# Altium PCB Chopper PMDC.PcbDoc (part 2 of 2)
Units mm, origin at the board's own origin, x right, y up, seen from the top; angles counter-clockwise.
Board outline 47.75 x 46.74 mm, 2 copper layers (Top Layer, Bottom Layer); 58 components, 29 nets, 163 pads, 6 vias.
Unrouted connection lines stored in the file: 2.
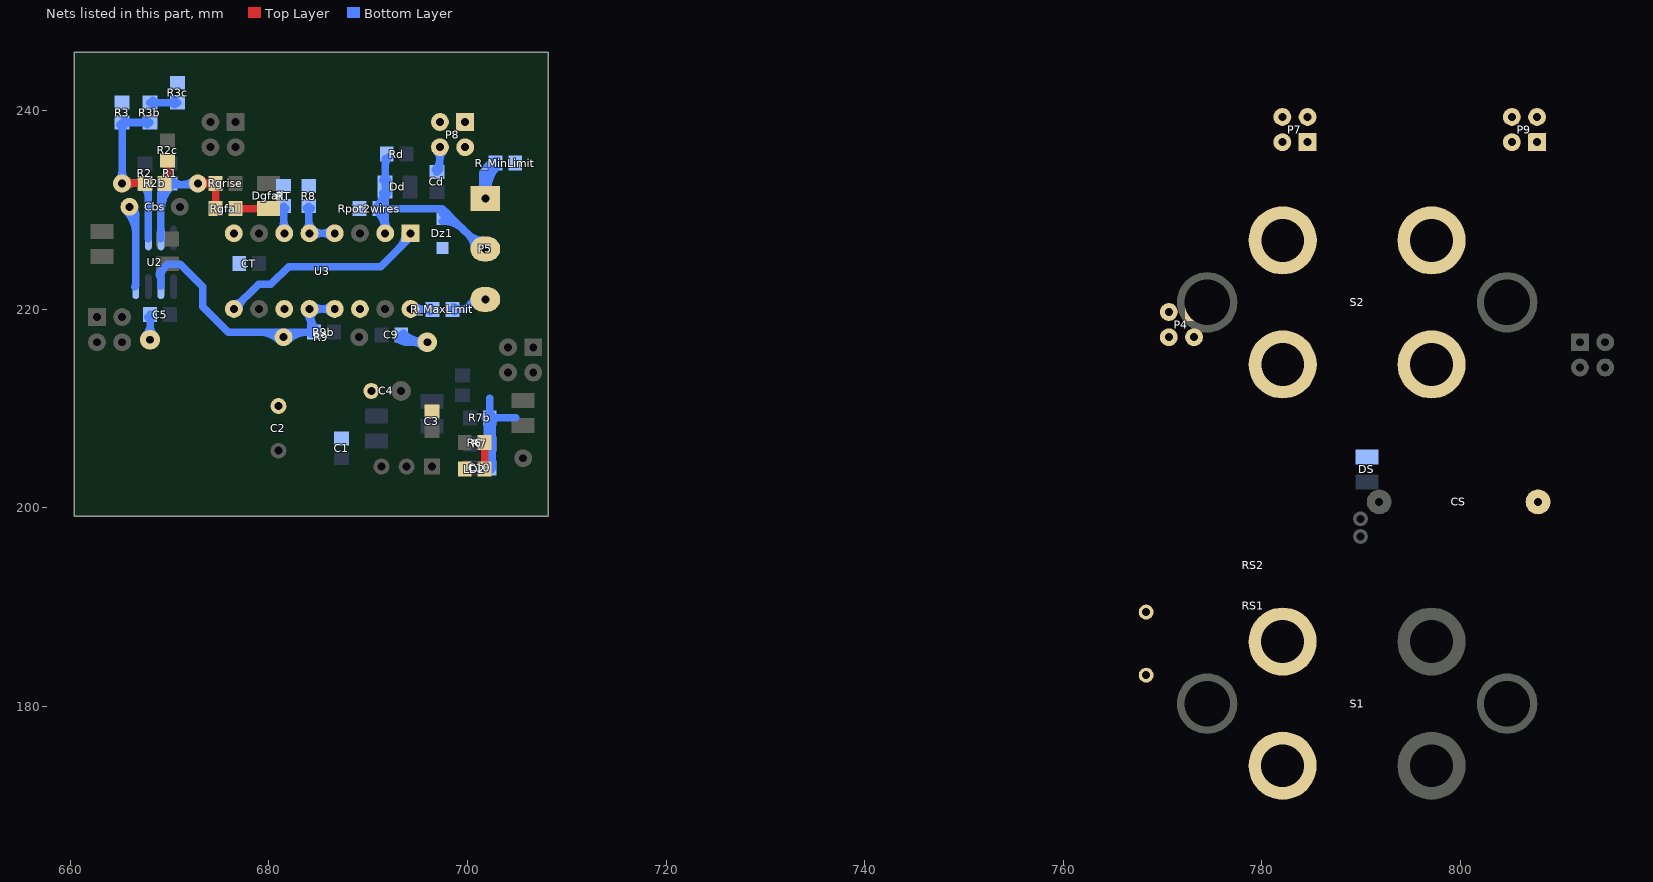
[diagram p2: the nets of this part, all layers, seen from the top]

## Via types
v1: diameter 1.8, hole 0.8, Top Layer to Bottom Layer, 3 vias
v2: diameter 2, hole 0.8, Top Layer to Bottom Layer, 2 vias
v3: diameter 3, hole 0.8, Top Layer to Bottom Layer, 1 vias

## Nets (pads, with @x,y where several pads share a name; then routed paths per layer and width w, separated by ;. In a path a pad name is that pad's centre, name@x,y a point inside that pad or via, vN(x,y) a via of type N, cw(c..) or ccw(c..) an arc to the next point about the centre after c; other vN are vias at no path point) (continued)
NetDgfall_2: Dgfall.K Rgfall.1 | length 13.2
  Top Layer w0.762: Rgfall.1@676.64,230.124 Dgfall.K@679.45,230.124 ; Rgfall.1@676.866,229.898 cw(c677.41,229.354) 677.41,230.124 ; Rgfall.1@676.866,229.898 cw(c677.41,229.354) 677.41,230.124 ; Rgfall.1@676.866,229.898 cw(c677.41,229.354) 677.41,230.124 ; Rgfall.1@676.866,229.898 cw(c677.41,229.354) 677.41,230.124 ; Rgfall.1@676.866,230.35 ccw(c677.41,230.894) 677.41,230.124 ; Rgfall.1@676.866,230.35 ccw(c677.41,230.894) 677.41,230.124 ; Rgfall.1@676.866,230.35 ccw(c677.41,230.894) 677.41,230.124 ; Rgfall.1@676.866,230.35 ccw(c677.41,230.894) 677.41,230.124 ; 678.627,230.124 ccw(c678.627,231.072) Dgfall.K@679.297,230.402 ; 678.627,230.124 ccw(c678.627,231.072) Dgfall.K@679.297,230.402 ; 678.627,230.124 ccw(c678.627,231.072) Dgfall.K@679.297,230.402 ; 678.627,230.124 ccw(c678.627,231.072) Dgfall.K@679.297,230.402 ; 678.708,230.124 cw(c678.708,229.291) Dgfall.K@679.297,229.88 ; 678.708,230.124 cw(c678.708,229.291) Dgfall.K@679.297,229.88 ; 678.708,230.124 cw(c678.708,229.291) Dgfall.K@679.297,229.88 ; 678.708,230.124 cw(c678.708,229.291) Dgfall.K@679.297,229.88
NetDS_1: DS.A P4.1 P4.2 P4.3 P4.4 RS1.2 RS2.2 S1.1 S2.3
NetLD2_1: LD2.1 R6.1 | length 12.2
  Top Layer w0.762: LD2.1@701.735,204.14 R6.1@701.735,206.553 R6.1@701.735,206.664 ; LD2.1@701.51,204.161 ccw(c700.965,204.706) 701.735,204.706 ; LD2.1@701.51,204.161 ccw(c700.965,204.706) 701.735,204.706 ; LD2.1@701.51,204.161 ccw(c700.965,204.706) 701.735,204.706 ; LD2.1@701.51,204.161 ccw(c700.965,204.706) 701.735,204.706 ; R6.1@701.51,206.277 cw(c700.965,205.733) 701.735,205.733 ; R6.1@701.51,206.277 cw(c700.965,205.733) 701.735,205.733 ; R6.1@701.51,206.277 cw(c700.965,205.733) 701.735,205.733 ; R6.1@701.51,206.277 cw(c700.965,205.733) 701.735,205.733 ; 701.735,204.706 ccw(c702.505,204.706) LD2.1@701.961,204.161 ; 701.735,204.706 ccw(c702.505,204.706) LD2.1@701.961,204.161 ; 701.735,204.706 ccw(c702.505,204.706) LD2.1@701.961,204.161 ; 701.735,204.706 ccw(c702.505,204.706) LD2.1@701.961,204.161 ; 701.735,205.733 cw(c702.505,205.733) R6.1@701.961,206.277 ; 701.735,205.733 cw(c702.505,205.733) R6.1@701.961,206.277 ; 701.735,205.733 cw(c702.505,205.733) R6.1@701.961,206.277 ; 701.735,205.733 cw(c702.505,205.733) R6.1@701.961,206.277
NetP5_1: P5.1 R_MinLimit.1 | length 32
  Bottom Layer w1.27: P5.1@701.802,231.14 701.802,233.68 R_MinLimit.1@702.818,234.696 ; P5.1@701.367,231.575 ccw(c700.317,232.625) 701.802,232.625 ; P5.1@701.367,231.575 ccw(c700.317,232.625) 701.802,232.625 ; P5.1@701.367,231.575 ccw(c700.317,232.625) 701.802,232.625 ; P5.1@701.367,231.575 ccw(c700.317,232.625) 701.802,232.625 ; P5.1@701.802,232.036 cw(c705.428,232.036) R_MinLimit.1@702.864,234.6 ; P5.1@701.802,232.036 cw(c705.428,232.036) R_MinLimit.1@702.864,234.6 ; P5.1@701.802,232.036 cw(c705.428,232.036) R_MinLimit.1@702.864,234.6 ; P5.1@701.802,232.036 cw(c705.428,232.036) R_MinLimit.1@702.864,234.6 ; 701.802,232.625 ccw(c703.287,232.625) P5.1@702.237,231.575 ; 701.802,232.625 ccw(c703.287,232.625) P5.1@702.237,231.575 ; 701.802,232.625 ccw(c703.287,232.625) P5.1@702.237,231.575 ; 701.802,232.625 ccw(c703.287,232.625) P5.1@702.237,231.575 ; 701.802,233.244 cw(c703.187,233.244) R_MinLimit.1@702.835,234.583 ; 701.802,233.244 cw(c703.187,233.244) R_MinLimit.1@702.835,234.583 ; 701.802,233.244 cw(c703.187,233.244) R_MinLimit.1@702.835,234.583 ; 701.802,233.244 cw(c703.187,233.244) R_MinLimit.1@702.835,234.583
NetP5_3: P5.3 R_MaxLimit.2 | length 13.7
  Bottom Layer w0.762: R_MaxLimit.2@698.484,219.964 699.77,219.964 700.786,220.98 P5.3@701.802,220.98 ; R_MaxLimit.2@698.71,219.738 cw(c699.254,219.194) 699.254,219.964 ; R_MaxLimit.2@698.71,219.738 cw(c699.254,219.194) 699.254,219.964 ; R_MaxLimit.2@698.71,219.738 cw(c699.254,219.194) 699.254,219.964 ; R_MaxLimit.2@698.71,219.738 cw(c699.254,219.194) 699.254,219.964 ; R_MaxLimit.2@698.71,220.19 ccw(c699.254,220.734) 699.254,219.964 ; R_MaxLimit.2@698.71,220.19 ccw(c699.254,220.734) 699.254,219.964 ; R_MaxLimit.2@698.71,220.19 ccw(c699.254,220.734) 699.254,219.964 ; R_MaxLimit.2@698.71,220.19 ccw(c699.254,220.734) 699.254,219.964 ; 700.35,220.544 cw(c701.235,219.658) P5.3@701.527,220.876 ; 700.35,220.544 cw(c701.235,219.658) P5.3@701.527,220.876 ; 700.35,220.544 cw(c701.235,219.658) P5.3@701.527,220.876 ; 700.35,220.544 cw(c701.235,219.658) P5.3@701.527,220.876
NetP7_1: P7.1 P7.2 P7.3 P7.4 S2.2
NetR1_2: R1.2 Rgfall.2 Rgrise.2 U2.7 | length 73.9
  Top Layer w0.762: v1(672.846,232.664) Rgrise.2@674.624,232.664 ; Rgfall.2@674.64,230.394 Rgrise.2@674.64,232.664 ; v1@673.213,232.297 cw(c674.099,231.411) Rgrise.2@674.099,232.664 ; v1@673.213,232.297 cw(c674.099,231.411) Rgrise.2@674.099,232.664 ; v1@673.213,232.297 cw(c674.099,231.411) Rgrise.2@674.099,232.664 ; v1@673.213,232.297 cw(c674.099,231.411) Rgrise.2@674.099,232.664 ; v1@673.213,233.031 ccw(c674.099,233.917) Rgrise.2@674.099,232.664 ; v1@673.213,233.031 ccw(c674.099,233.917) Rgrise.2@674.099,232.664 ; v1@673.213,233.031 ccw(c674.099,233.917) Rgrise.2@674.099,232.664 ; v1@673.213,233.031 ccw(c674.099,233.917) Rgrise.2@674.099,232.664 ; 673.87,232.664 cw(c673.87,231.894) Rgrise.2@674.414,232.438 ; 673.87,232.664 ccw(c673.87,233.434) Rgrise.2@674.414,232.89 ; 673.87,232.664 ccw(c673.87,233.434) Rgrise.2@674.414,232.89 ; 673.87,232.664 cw(c673.87,231.894) Rgrise.2@674.414,232.438 ; 673.87,232.664 ccw(c673.87,233.434) Rgrise.2@674.414,232.89 ; 673.87,232.664 cw(c673.87,231.894) Rgrise.2@674.414,232.438 ; 673.87,232.664 ccw(c673.87,233.434) Rgrise.2@674.414,232.89 ; 673.87,232.664 cw(c673.87,231.894) Rgrise.2@674.414,232.438 ; Rgfall.2@674.414,230.4 ccw(c673.87,230.944) 674.64,230.944 ; Rgfall.2@674.414,230.4 ccw(c673.87,230.944) 674.64,230.944 ; Rgfall.2@674.414,230.4 ccw(c673.87,230.944) 674.64,230.944 ; Rgfall.2@674.414,230.4 ccw(c673.87,230.944) 674.64,230.944 ; Rgrise.2@674.414,232.388 cw(c673.87,231.844) 674.64,231.844 ; Rgrise.2@674.414,232.388 cw(c673.87,231.844) 674.64,231.844 ; Rgrise.2@674.414,232.388 cw(c673.87,231.844) 674.64,231.844 ; Rgrise.2@674.414,232.388 cw(c673.87,231.844) 674.64,231.844 ; 674.64,230.944 ccw(c675.41,230.944) Rgfall.2@674.866,230.4 ; 674.64,230.944 ccw(c675.41,230.944) Rgfall.2@674.866,230.4 ; 674.64,230.944 ccw(c675.41,230.944) Rgfall.2@674.866,230.4 ; 674.64,230.944 ccw(c675.41,230.944) Rgfall.2@674.866,230.4 ; 674.64,231.844 cw(c675.41,231.844) Rgrise.2@674.866,232.388 ; 674.64,231.844 cw(c675.41,231.844) Rgrise.2@674.866,232.388 ; 674.64,231.844 cw(c675.41,231.844) Rgrise.2@674.866,232.388 ; 674.64,231.844 cw(c675.41,231.844) Rgrise.2@674.866,232.388
  Bottom Layer w0.762: U2.7@669.138,227.114 U2.7@669.138,227.164 669.138,231.623 670.052,232.537 v1@672.719,232.537 ; 669.138,229.807 cw(c672.859,229.807) R1.2@670.228,232.438 ; 669.138,229.807 cw(c672.859,229.807) R1.2@670.228,232.438 ; 669.138,229.807 cw(c672.859,229.807) R1.2@670.228,232.438 ; 669.138,229.807 cw(c672.859,229.807) R1.2@670.228,232.438 ; 669.138,231.311 cw(c670.184,231.311) R1.2@670.045,232.348 ; 669.138,231.311 cw(c670.184,231.311) R1.2@670.045,232.348 ; 669.138,231.311 cw(c670.184,231.311) R1.2@670.045,232.348 ; 669.138,231.311 cw(c670.184,231.311) R1.2@670.045,232.348 ; 669.138,231.647 cw(c671.019,231.647) R1.2@669.689,232.977 ; 669.138,231.647 cw(c671.019,231.647) R1.2@669.689,232.977 ; 669.138,231.647 cw(c671.019,231.647) R1.2@669.689,232.977 ; 669.138,231.647 cw(c671.019,231.647) R1.2@669.689,232.977 ; 669.332,231.817 ccw(c668.486,232.664) R1.2@669.683,232.664 ; 669.332,231.817 ccw(c668.486,232.664) R1.2@669.683,232.664 ; 669.332,231.817 ccw(c668.486,232.664) R1.2@669.683,232.664 ; 669.332,231.817 ccw(c668.486,232.664) R1.2@669.683,232.664 ; R1.2@670.328,232.89 ccw(c671.179,233.741) 671.179,232.537 ; R1.2@670.328,232.89 ccw(c671.179,233.741) 671.179,232.537 ; R1.2@670.328,232.89 ccw(c671.179,233.741) 671.179,232.537 ; R1.2@670.328,232.89 ccw(c671.179,233.741) 671.179,232.537 ; 671.286,232.537 ccw(c671.286,234.224) v1@672.479,233.031 ; 671.286,232.537 ccw(c671.286,234.224) v1@672.479,233.031 ; 671.286,232.537 ccw(c671.286,234.224) v1@672.479,233.031 ; 671.286,232.537 ccw(c671.286,234.224) v1@672.479,233.031 ; 671.9,232.537 cw(c671.9,231.718) v1@672.479,232.297 ; 671.9,232.537 cw(c671.9,231.718) v1@672.479,232.297 ; 671.9,232.537 cw(c671.9,231.718) v1@672.479,232.297 ; 671.9,232.537 cw(c671.9,231.718) v1@672.479,232.297
NetR2_2: R2.2 R2b.2 R3.1 R3b.1 U2.6 | length 72.8
  Top Layer w0.762: v1(665.226,232.664) R2b.2@667.512,232.664 ; v1@665.593,232.297 cw(c666.479,231.411) 666.479,232.664 ; v1@665.593,232.297 cw(c666.479,231.411) 666.479,232.664 ; v1@665.593,232.297 cw(c666.479,231.411) 666.479,232.664 ; v1@665.593,232.297 cw(c666.479,231.411) 666.479,232.664 ; v1@665.593,233.031 ccw(c666.479,233.917) 666.479,232.664 ; v1@665.593,233.031 ccw(c666.479,233.917) 666.479,232.664 ; v1@665.593,233.031 ccw(c666.479,233.917) 666.479,232.664 ; v1@665.593,233.031 ccw(c666.479,233.917) 666.479,232.664 ; 666.742,232.664 cw(c666.742,231.894) R2b.2@667.286,232.438 ; 666.742,232.664 ccw(c666.742,233.434) R2b.2@667.286,232.89 ; 666.742,232.664 ccw(c666.742,233.434) R2b.2@667.286,232.89 ; 666.742,232.664 cw(c666.742,231.894) R2b.2@667.286,232.438 ; 666.742,232.664 ccw(c666.742,233.434) R2b.2@667.286,232.89 ; 666.742,232.664 cw(c666.742,231.894) R2b.2@667.286,232.438 ; 666.742,232.664 ccw(c666.742,233.434) R2b.2@667.286,232.89 ; 666.742,232.664 cw(c666.742,231.894) R2b.2@667.286,232.438
  Bottom Layer w0.762: R2.2@667.512,232.664 R2.2@667.258,232.664 ; U2.6@667.868,227.114 U2.6@667.868,227.164 667.868,232.054 667.385,232.537 R2.2@667.258,232.664 ; R3b.1@668.02,238.792 R3.1@665.226,238.792 v1(665.226,232.664) R2.2@667.258,232.664 ; v1@664.859,233.031 ccw(c663.973,233.917) 665.226,233.917 ; v1@664.859,233.031 ccw(c663.973,233.917) 665.226,233.917 ; v1@664.859,233.031 ccw(c663.973,233.917) 665.226,233.917 ; v1@664.859,233.031 ccw(c663.973,233.917) 665.226,233.917 ; R3.1@665,238.566 cw(c664.456,238.022) 665.226,238.022 ; R3.1@665,238.566 cw(c664.456,238.022) 665.226,238.022 ; R3.1@665,238.566 cw(c664.456,238.022) 665.226,238.022 ; R3.1@665,238.566 cw(c664.456,238.022) 665.226,238.022 ; 665.226,233.917 ccw(c666.479,233.917) v1@665.593,233.031 ; 665.226,233.917 ccw(c666.479,233.917) v1@665.593,233.031 ; 665.226,233.917 ccw(c666.479,233.917) v1@665.593,233.031 ; 665.226,233.917 ccw(c666.479,233.917) v1@665.593,233.031 ; 665.226,238.022 cw(c665.996,238.022) R3.1@665.452,238.566 ; 665.226,238.022 cw(c665.996,238.022) R3.1@665.452,238.566 ; 665.226,238.022 cw(c665.996,238.022) R3.1@665.452,238.566 ; 665.226,238.022 cw(c665.996,238.022) R3.1@665.452,238.566 ; R3.1@665.502,238.566 cw(c666.046,238.022) 666.046,238.792 ; R3.1@665.502,238.566 cw(c666.046,238.022) 666.046,238.792 ; R3.1@665.502,238.566 cw(c666.046,238.022) 666.046,238.792 ; R3.1@665.502,238.566 cw(c666.046,238.022) 666.046,238.792 ; R3.1@665.502,239.018 ccw(c666.046,239.562) 666.046,238.792 ; R3.1@665.502,239.018 ccw(c666.046,239.562) 666.046,238.792 ; R3.1@665.502,239.018 ccw(c666.046,239.562) 666.046,238.792 ; R3.1@665.502,239.018 ccw(c666.046,239.562) 666.046,238.792 ; v1@665.593,232.297 cw(c666.479,231.411) 666.479,232.664 ; v1@665.593,232.297 cw(c666.479,231.411) 666.479,232.664 ; v1@665.593,232.297 cw(c666.479,231.411) 666.479,232.664 ; v1@665.593,232.297 cw(c666.479,231.411) 666.479,232.664 ; v1@665.593,233.031 ccw(c666.479,233.917) 666.479,232.664 ; v1@665.593,233.031 ccw(c666.479,233.917) 666.479,232.664 ; v1@665.593,233.031 ccw(c666.479,233.917) 666.479,232.664 ; v1@665.593,233.031 ccw(c666.479,233.917) 666.479,232.664 ; 666.692,232.664 cw(c666.692,231.894) R2.2@667.236,232.438 ; 666.692,232.664 ccw(c666.692,233.434) R2.2@667.236,232.89 ; 666.692,232.664 ccw(c666.692,233.434) R2.2@667.236,232.89 ; 666.692,232.664 cw(c666.692,231.894) R2.2@667.236,232.438 ; 666.692,232.664 ccw(c666.692,233.434) R2.2@667.236,232.89 ; 666.692,232.664 cw(c666.692,231.894) R2.2@667.236,232.438 ; 666.692,232.664 ccw(c666.692,233.434) R2.2@667.236,232.89 ; 666.692,232.664 cw(c666.692,231.894) R2.2@667.236,232.438 ; 667.2,238.792 cw(c667.2,238.022) R3b.1@667.744,238.566 ; 667.2,238.792 ccw(c667.2,239.562) R3b.1@667.744,239.018 ; 667.2,238.792 ccw(c667.2,239.562) R3b.1@667.744,239.018 ; 667.2,238.792 cw(c667.2,238.022) R3b.1@667.744,238.566 ; 667.2,238.792 ccw(c667.2,239.562) R3b.1@667.744,239.018 ; 667.2,238.792 cw(c667.2,238.022) R3b.1@667.744,238.566 ; 667.2,238.792 ccw(c667.2,239.562) R3b.1@667.744,239.018 ; 667.2,238.792 cw(c667.2,238.022) R3b.1@667.744,238.566 ; R2.2@667.336,232.438 cw(c666.054,231.156) 667.868,231.156 ; R2.2@667.336,232.438 cw(c666.054,231.156) 667.868,231.156 ; R2.2@667.336,232.438 cw(c666.054,231.156) 667.868,231.156 ; R2.2@667.336,232.438 cw(c666.054,231.156) 667.868,231.156
NetR2b_1: R2b.1 R2c.2 | length 12.7
  Top Layer w0.762: R2b.1@669.512,232.664 669.798,232.95 R2c.2@669.798,234.95 ; R2b.1@669.286,232.94 ccw(c668.051,234.175) 669.798,234.175 ; R2b.1@669.286,232.94 ccw(c668.051,234.175) 669.798,234.175 ; R2b.1@669.286,232.94 ccw(c668.051,234.175) 669.798,234.175 ; R2b.1@669.286,232.94 ccw(c668.051,234.175) 669.798,234.175 ; R2c.2@669.572,234.756 cw(c669.028,234.212) 669.798,234.212 ; R2c.2@669.572,234.756 cw(c669.028,234.212) 669.798,234.212 ; R2c.2@669.572,234.756 cw(c669.028,234.212) 669.798,234.212 ; R2c.2@669.572,234.756 cw(c669.028,234.212) 669.798,234.212 ; 669.798,234.212 cw(c670.568,234.212) R2c.2@670.024,234.756 ; 669.798,234.212 cw(c670.568,234.212) R2c.2@670.024,234.756 ; 669.798,234.212 cw(c670.568,234.212) R2c.2@670.024,234.756 ; 669.798,234.212 cw(c670.568,234.212) R2c.2@670.024,234.756
NetR3b_2: R3b.2 R3c.2 | length 12.5
  Bottom Layer w0.762: R3b.2@668.02,240.792 R3c.2@670.814,240.792 ; R3b.2@668.296,240.566 cw(c668.84,240.022) 668.84,240.792 ; R3b.2@668.296,240.566 cw(c668.84,240.022) 668.84,240.792 ; R3b.2@668.296,240.566 cw(c668.84,240.022) 668.84,240.792 ; R3b.2@668.296,240.566 cw(c668.84,240.022) 668.84,240.792 ; R3b.2@668.296,241.018 ccw(c668.84,241.562) 668.84,240.792 ; R3b.2@668.296,241.018 ccw(c668.84,241.562) 668.84,240.792 ; R3b.2@668.296,241.018 ccw(c668.84,241.562) 668.84,240.792 ; R3b.2@668.296,241.018 ccw(c668.84,241.562) 668.84,240.792 ; 669.994,240.792 cw(c669.994,240.022) R3c.2@670.538,240.566 ; 669.994,240.792 ccw(c669.994,241.562) R3c.2@670.538,241.018 ; 669.994,240.792 ccw(c669.994,241.562) R3c.2@670.538,241.018 ; 669.994,240.792 cw(c669.994,240.022) R3c.2@670.538,240.566 ; 669.994,240.792 ccw(c669.994,241.562) R3c.2@670.538,241.018 ; 669.994,240.792 cw(c669.994,240.022) R3c.2@670.538,240.566 ; 669.994,240.792 ccw(c669.994,241.562) R3c.2@670.538,241.018 ; 669.994,240.792 cw(c669.994,240.022) R3c.2@670.538,240.566
NetR8_1: R8.1 U3.4 U3.5 | length 33.4
  Bottom Layer w0.762: U3.5@684.022,228.092 R8.1@684.022,230.378 ; U3.5@684.098,227.635 U3.4@686.638,227.635 U3.4@686.765,227.635 ; U3.5@683.731,228.002 ccw(c683.029,228.704) 684.022,228.704 ; U3.5@683.731,228.002 ccw(c683.029,228.704) 684.022,228.704 ; U3.5@683.731,228.002 ccw(c683.029,228.704) 684.022,228.704 ; U3.5@683.731,228.002 ccw(c683.029,228.704) 684.022,228.704 ; R8.1@683.796,230.152 cw(c683.252,229.608) 684.022,229.608 ; R8.1@683.796,230.152 cw(c683.252,229.608) 684.022,229.608 ; R8.1@683.796,230.152 cw(c683.252,229.608) 684.022,229.608 ; R8.1@683.796,230.152 cw(c683.252,229.608) 684.022,229.608 ; 684.022,229.072 ccw(c685.535,229.072) U3.5@684.465,228.002 ; 684.022,229.072 ccw(c685.535,229.072) U3.5@684.465,228.002 ; 684.022,229.072 ccw(c685.535,229.072) U3.5@684.465,228.002 ; 684.022,229.072 ccw(c685.535,229.072) U3.5@684.465,228.002 ; 684.022,229.608 cw(c684.792,229.608) R8.1@684.248,230.152 ; 684.022,229.608 cw(c684.792,229.608) R8.1@684.248,230.152 ; 684.022,229.608 cw(c684.792,229.608) R8.1@684.248,230.152 ; 684.022,229.608 cw(c684.792,229.608) R8.1@684.248,230.152 ; U3.5@684.465,227.268 cw(c685.351,226.382) 685.351,227.635 ; U3.5@684.465,227.268 cw(c685.351,226.382) 685.351,227.635 ; U3.5@684.465,227.268 cw(c685.351,226.382) 685.351,227.635 ; U3.5@684.465,227.268 cw(c685.351,226.382) 685.351,227.635 ; U3.5@684.465,228.002 ccw(c685.351,228.888) 685.351,227.635 ; U3.5@684.465,228.002 ccw(c685.351,228.888) 685.351,227.635 ; U3.5@684.465,228.002 ccw(c685.351,228.888) 685.351,227.635 ; U3.5@684.465,228.002 ccw(c685.351,228.888) 685.351,227.635 ; 685.385,227.635 cw(c685.385,226.382) U3.4@686.271,227.268 ; 685.385,227.635 ccw(c685.385,228.888) U3.4@686.271,228.002 ; 685.385,227.635 ccw(c685.385,228.888) U3.4@686.271,228.002 ; 685.385,227.635 cw(c685.385,226.382) U3.4@686.271,227.268 ; 685.385,227.635 ccw(c685.385,228.888) U3.4@686.271,228.002 ; 685.385,227.635 cw(c685.385,226.382) U3.4@686.271,227.268 ; 685.385,227.635 ccw(c685.385,228.888) U3.4@686.271,228.002 ; 685.385,227.635 cw(c685.385,226.382) U3.4@686.271,227.268
NetR_MaxLimit_1: R_MaxLimit.1 U3.16 | length 15
  Bottom Layer w0.762: U3.16@694.258,220.015 694.309,219.964 R_MaxLimit.1@696.484,219.964 ; U3.16@694.625,219.648 cw(c695.389,218.884) 695.389,219.964 ; U3.16@694.625,219.648 cw(c695.389,218.884) 695.389,219.964 ; U3.16@694.625,219.648 cw(c695.389,218.884) 695.389,219.964 ; U3.16@694.625,219.648 cw(c695.389,218.884) 695.389,219.964 ; U3.16@694.625,220.382 ccw(c695.634,221.39) 695.634,219.964 ; U3.16@694.625,220.382 ccw(c695.634,221.39) 695.634,219.964 ; U3.16@694.625,220.382 ccw(c695.634,221.39) 695.634,219.964 ; U3.16@694.625,220.382 ccw(c695.634,221.39) 695.634,219.964 ; 695.714,219.964 cw(c695.714,219.194) R_MaxLimit.1@696.258,219.738 ; 695.714,219.964 ccw(c695.714,220.734) R_MaxLimit.1@696.258,220.19 ; 695.714,219.964 ccw(c695.714,220.734) R_MaxLimit.1@696.258,220.19 ; 695.714,219.964 cw(c695.714,219.194) R_MaxLimit.1@696.258,219.738 ; 695.714,219.964 ccw(c695.714,220.734) R_MaxLimit.1@696.258,220.19 ; 695.714,219.964 cw(c695.714,219.194) R_MaxLimit.1@696.258,219.738 ; 695.714,219.964 ccw(c695.714,220.734) R_MaxLimit.1@696.258,220.19 ; 695.714,219.964 cw(c695.714,219.194) R_MaxLimit.1@696.258,219.738
NetRT_1: RT.1 U3.6 | length 15.5
  Bottom Layer w0.762: U3.6@681.482,227.584 681.482,227.635 RT.1@681.482,230.378 ; U3.6@681.191,228.002 ccw(c680.489,228.704) 681.482,228.704 ; U3.6@681.191,228.002 ccw(c680.489,228.704) 681.482,228.704 ; U3.6@681.191,228.002 ccw(c680.489,228.704) 681.482,228.704 ; U3.6@681.191,228.002 ccw(c680.489,228.704) 681.482,228.704 ; RT.1@681.256,230.152 cw(c680.712,229.608) 681.482,229.608 ; RT.1@681.256,230.152 cw(c680.712,229.608) 681.482,229.608 ; RT.1@681.256,230.152 cw(c680.712,229.608) 681.482,229.608 ; RT.1@681.256,230.152 cw(c680.712,229.608) 681.482,229.608 ; 681.482,229.072 ccw(c682.995,229.072) U3.6@681.925,228.002 ; 681.482,229.072 ccw(c682.995,229.072) U3.6@681.925,228.002 ; 681.482,229.072 ccw(c682.995,229.072) U3.6@681.925,228.002 ; 681.482,229.072 ccw(c682.995,229.072) U3.6@681.925,228.002 ; 681.482,229.608 cw(c682.252,229.608) RT.1@681.708,230.152 ; 681.482,229.608 cw(c682.252,229.608) RT.1@681.708,230.152 ; 681.482,229.608 cw(c682.252,229.608) RT.1@681.708,230.152 ; 681.482,229.608 cw(c682.252,229.608) RT.1@681.708,230.152
NetU3_1: U3.1 U3.9 | length 35.5
  Bottom Layer w0.762: U3.9@676.478,220.015 678.967,222.504 680.212,222.504 681.99,224.282 691.255,224.282 694.131,227.159 U3.1@694.131,227.635 ; U3.9@676.478,220.534 ccw(c676.478,221.787) 677.364,220.901 ; U3.9@676.478,220.534 ccw(c676.478,221.787) 677.364,220.901 ; U3.9@676.478,220.534 ccw(c676.478,221.787) 677.364,220.901 ; U3.9@676.478,220.534 ccw(c676.478,221.787) 677.364,220.901 ; U3.9@676.997,220.015 cw(c678.25,220.015) 677.364,220.901 ; U3.9@676.997,220.015 cw(c678.25,220.015) 677.364,220.901 ; U3.9@676.997,220.015 cw(c678.25,220.015) 677.364,220.901 ; U3.9@676.997,220.015 cw(c678.25,220.015) 677.364,220.901 ; 693.125,226.153 ccw(c691.643,227.635) U3.1@693.739,227.635 ; 693.125,226.153 ccw(c691.643,227.635) U3.1@693.739,227.635 ; 693.125,226.153 ccw(c691.643,227.635) U3.1@693.739,227.635 ; 693.125,226.153 ccw(c691.643,227.635) U3.1@693.739,227.635
POTENTIOMETER: Dd.K Dz1.2 P5.2 Rd.1 Rpot2wires.1 U3.2 | length 95.5
  Bottom Layer w0.762: Rpot2wires.1@691.134,230.276 Rpot2wires.1@691.718,230.276 ; U3.2@691.718,227.635 Rpot2wires.1@691.718,230.124 ; Rd.1@691.718,235.128 Dd.K@691.718,232.308 ; Rpot2wires.1@691.744,230.276 Rpot2wires.1@691.718,230.276 ; P5.2@701.802,225.806 701.675,225.933 697.992,229.616 697.484,230.124 Rpot2wires.1@691.718,230.124 ; Rpot2wires.1@690.908,229.848 cw(c688.953,227.893) U3.2@691.718,227.893 ; Rpot2wires.1@690.908,229.848 cw(c688.953,227.893) U3.2@691.718,227.893 ; Rpot2wires.1@690.908,229.848 cw(c688.953,227.893) U3.2@691.718,227.893 ; Rpot2wires.1@690.908,229.848 cw(c688.953,227.893) U3.2@691.718,227.893 ; Rpot2wires.1@690.912,230.403 ccw(c689.064,232.308) Dd.K@691.718,232.308 ; Rpot2wires.1@690.912,230.403 ccw(c689.064,232.308) Dd.K@691.718,232.308 ; Rpot2wires.1@690.912,230.403 ccw(c689.064,232.308) Dd.K@691.718,232.308 ; Rpot2wires.1@690.912,230.403 ccw(c689.064,232.308) Dd.K@691.718,232.308 ; U3.2@691.351,228.002 ccw(c690.465,228.888) 691.718,228.888 ; U3.2@691.351,228.002 ccw(c690.465,228.888) 691.718,228.888 ; U3.2@691.351,228.002 ccw(c690.465,228.888) 691.718,228.888 ; U3.2@691.351,228.002 ccw(c690.465,228.888) 691.718,228.888 ; Rpot2wires.1@691.36,229.898 cw(c691.904,229.354) 691.904,230.124 ; Rpot2wires.1@691.36,229.898 cw(c691.904,229.354) 691.904,230.124 ; Rpot2wires.1@691.36,229.898 cw(c691.904,229.354) 691.904,230.124 ; Rpot2wires.1@691.36,229.898 cw(c691.904,229.354) 691.904,230.124 ; Rpot2wires.1@691.36,230.35 ccw(c691.904,230.894) 691.904,230.124 ; Rpot2wires.1@691.36,230.35 ccw(c691.904,230.894) 691.904,230.124 ; Rpot2wires.1@691.36,230.35 ccw(c691.904,230.894) 691.904,230.124 ; Rpot2wires.1@691.36,230.35 ccw(c691.904,230.894) 691.904,230.124 ; Dd.K@691.457,231.647 cw(c690.827,231.018) 691.718,231.018 ; Dd.K@691.457,231.647 cw(c690.827,231.018) 691.718,231.018 ; Dd.K@691.457,231.647 cw(c690.827,231.018) 691.718,231.018 ; Dd.K@691.457,231.647 cw(c690.827,231.018) 691.718,231.018 ; Dd.K@691.457,232.969 ccw(c690.827,233.599) 691.718,233.599 ; Dd.K@691.457,232.969 ccw(c690.827,233.599) 691.718,233.599 ; Dd.K@691.457,232.969 ccw(c690.827,233.599) 691.718,233.599 ; Dd.K@691.457,232.969 ccw(c690.827,233.599) 691.718,233.599 ; 691.718,228.888 ccw(c692.971,228.888) U3.2@692.085,228.002 ; 691.718,228.888 ccw(c692.971,228.888) U3.2@692.085,228.002 ; 691.718,228.888 ccw(c692.971,228.888) U3.2@692.085,228.002 ; 691.718,228.888 ccw(c692.971,228.888) U3.2@692.085,228.002 ; Rpot2wires.1@691.718,230.124 Rpot2wires.1@691.718,230.276 ; Rpot2wires.1@691.718,230.276 Dd.K@691.718,232.308 ; 691.718,231.018 cw(c692.609,231.018) Dd.K@691.979,231.647 ; 691.718,231.018 cw(c692.609,231.018) Dd.K@691.979,231.647 ; 691.718,231.018 cw(c692.609,231.018) Dd.K@691.979,231.647 ; 691.718,231.018 cw(c692.609,231.018) Dd.K@691.979,231.647 ; 691.718,233.599 ccw(c692.609,233.599) Dd.K@691.979,232.969 ; 691.718,233.599 ccw(c692.609,233.599) Dd.K@691.979,232.969 ; 691.718,233.599 ccw(c692.609,233.599) Dd.K@691.979,232.969 ; 691.718,233.599 ccw(c692.609,233.599) Dd.K@691.979,232.969 ; 691.718,234.406 cw(c693.031,234.406) Rd.1@692.103,235.335 ; 691.718,234.406 cw(c693.031,234.406) Rd.1@692.103,235.335 ; 691.718,234.406 cw(c693.031,234.406) Rd.1@692.103,235.335 ; 691.718,234.406 cw(c693.031,234.406) Rd.1@692.103,235.335 ; Dz1.2@697.484,228.864 cw(c697.484,225.822) 699.635,227.973 ; Dz1.2@697.484,228.864 cw(c697.484,225.822) 699.635,227.973 ; Dz1.2@697.484,228.864 cw(c697.484,225.822) 699.635,227.973 ; Dz1.2@697.484,228.864 cw(c697.484,225.822) 699.635,227.973 ; Dz1.2@697.484,229.626 cw(c697.484,228.424) 698.334,229.274 ; Dz1.2@697.484,229.626 cw(c697.484,228.424) 698.334,229.274 ; Dz1.2@697.484,229.626 cw(c697.484,228.424) 698.334,229.274 ; Dz1.2@697.484,229.626 cw(c697.484,228.424) 698.334,229.274 ; 697.798,229.81 cw(c697.218,229.23) Dz1.2@697.978,228.923 ; 697.798,229.81 cw(c697.218,229.23) Dz1.2@697.978,228.923 ; 697.798,229.81 cw(c697.218,229.23) Dz1.2@697.978,228.923 ; 697.798,229.81 cw(c697.218,229.23) Dz1.2@697.978,228.923 ; 700.062,227.546 ccw(c701.552,229.037) P5.2@701.552,226.929 ; 700.062,227.546 ccw(c701.552,229.037) P5.2@701.552,226.929 ; 700.062,227.546 ccw(c701.552,229.037) P5.2@701.552,226.929 ; 700.062,227.546 ccw(c701.552,229.037) P5.2@701.552,226.929 ; 700.071,227.537 cw(c698.595,226.06) P5.2@700.683,226.06 ; 700.071,227.537 cw(c698.595,226.06) P5.2@700.683,226.06 ; 700.071,227.537 cw(c698.595,226.06) P5.2@700.683,226.06 ; 700.071,227.537 cw(c698.595,226.06) P5.2@700.683,226.06
PWM: R9.2 R9b.2 U2.2 U3.12 U3.13 | length 87.1
  Bottom Layer w0.762: U2.2@669.138,222.314 669.138,223.876 ; U3.13@686.511,220.015 684.225,220.015 684.225,217.678 681.482,217.678 675.894,217.678 673.354,220.218 673.354,222.25 671.068,224.536 669.798,224.536 669.138,223.876 ; U2.2@669.107,223.164 cw(c670.75,223.164) 669.588,224.326 ; U2.2@669.107,223.164 cw(c670.75,223.164) 669.588,224.326 ; U2.2@669.107,223.164 cw(c670.75,223.164) 669.588,224.326 ; U2.2@669.107,223.164 cw(c670.75,223.164) 669.588,224.326 ; U2.2@669.114,223.143 cw(c669.516,223.497) 669.138,223.876 ; U2.2@669.114,223.143 cw(c669.516,223.497) 669.138,223.876 ; U2.2@669.114,223.143 cw(c669.516,223.497) 669.138,223.876 ; U2.2@669.114,223.143 cw(c669.516,223.497) 669.138,223.876 ; 679.003,217.678 cw(c679.003,214.691) R9.2@681.115,216.803 ; 679.003,217.678 cw(c679.003,214.691) R9.2@681.115,216.803 ; 679.003,217.678 cw(c679.003,214.691) R9.2@681.115,216.803 ; 679.003,217.678 cw(c679.003,214.691) R9.2@681.115,216.803 ; R9.2@681.849,216.803 cw(c683.961,214.691) R9b.2@683.961,217.678 ; R9.2@681.849,216.803 cw(c683.961,214.691) R9b.2@683.961,217.678 ; R9.2@681.849,216.803 cw(c683.961,214.691) R9b.2@683.961,217.678 ; R9.2@681.849,216.803 cw(c683.961,214.691) R9b.2@683.961,217.678 ; U3.12@683.731,219.648 cw(c682.539,218.455) 684.225,218.455 ; U3.12@683.731,219.648 cw(c682.539,218.455) 684.225,218.455 ; U3.12@683.731,219.648 cw(c682.539,218.455) 684.225,218.455 ; U3.12@683.731,219.648 cw(c682.539,218.455) 684.225,218.455 ; 683.776,217.678 cw(c683.776,216.908) R9b.2@684.32,217.452 ; 683.776,217.678 ccw(c683.776,218.448) R9b.2@684.32,217.904 ; 683.776,217.678 ccw(c683.776,218.448) R9b.2@684.32,217.904 ; 683.776,217.678 cw(c683.776,216.908) R9b.2@684.32,217.452 ; 683.776,217.678 ccw(c683.776,218.448) R9b.2@684.32,217.904 ; 683.776,217.678 cw(c683.776,216.908) R9b.2@684.32,217.452 ; 683.776,217.678 ccw(c683.776,218.448) R9b.2@684.32,217.904 ; 683.776,217.678 cw(c683.776,216.908) R9b.2@684.32,217.452 ; 684.225,219.068 cw(c685.045,219.068) U3.12@684.465,219.648 ; 684.225,219.068 cw(c685.045,219.068) U3.12@684.465,219.648 ; 684.225,219.068 cw(c685.045,219.068) U3.12@684.465,219.648 ; 684.225,219.068 cw(c685.045,219.068) U3.12@684.465,219.648 ; U3.12@684.225,219.273 ccw(c686.091,219.273) R9b.2@684.772,217.954 ; U3.12@684.225,219.273 ccw(c686.091,219.273) R9b.2@684.772,217.954 ; U3.12@684.225,219.273 ccw(c686.091,219.273) R9b.2@684.772,217.954 ; U3.12@684.225,219.273 ccw(c686.091,219.273) R9b.2@684.772,217.954 ; U3.12@684.465,219.648 cw(c685.351,218.762) 685.351,220.015 ; U3.12@684.465,219.648 cw(c685.351,218.762) 685.351,220.015 ; U3.12@684.465,219.648 cw(c685.351,218.762) 685.351,220.015 ; U3.12@684.465,219.648 cw(c685.351,218.762) 685.351,220.015 ; U3.12@684.465,220.382 ccw(c685.351,221.268) 685.351,220.015 ; U3.12@684.465,220.382 ccw(c685.351,221.268) 685.351,220.015 ; U3.12@684.465,220.382 ccw(c685.351,221.268) 685.351,220.015 ; U3.12@684.465,220.382 ccw(c685.351,221.268) 685.351,220.015 ; 685.385,220.015 cw(c685.385,218.762) U3.13@686.271,219.648 ; 685.385,220.015 ccw(c685.385,221.268) U3.13@686.271,220.382 ; 685.385,220.015 ccw(c685.385,221.268) U3.13@686.271,220.382 ; 685.385,220.015 cw(c685.385,218.762) U3.13@686.271,219.648 ; 685.385,220.015 ccw(c685.385,221.268) U3.13@686.271,220.382 ; 685.385,220.015 cw(c685.385,218.762) U3.13@686.271,219.648 ; 685.385,220.015 ccw(c685.385,221.268) U3.13@686.271,220.382 ; 685.385,220.015 cw(c685.385,218.762) U3.13@686.271,219.648
SOURCE: C1.1 C2.1 C3.1 C4.1 C5.2 C9.2 C10.1 Cbs.1 Cd.2 CS.1 CT.2 Dz1.1 LD2.2 P8.1 P8.2 P8.3 P8.4 P9.1 P9.2 P9.3 P9.4 R3.2 R3c.1 R7.1 R7b.1 R8.2 R_MinLimit.2 Rpot2wires.2 RT.2 S2.1 U2.4 U2.5 U3.8 U3.11 U3.14 | length 94.9
  Bottom Layer w0.762: Cbs.1@665.912,230.276 665.924,230.264 666.505,229.683 666.598,229.591 U2.5@666.598,227.164 ; U2.4@666.496,222.25 666.554,222.308 666.598,222.352 U2.5@666.598,227.164 ; U2.5@666.598,227.114 U2.5@666.598,227.164 ; v2@668.052,216.948 C5.2@668.052,219.456 ; C9.2@693.337,217.398 694.073,216.662 v2(695.96,216.662) ; Cd.2@696.925,233.8 697.23,234.105 P8.4@697.23,236.304 P8.4@697.23,236.474 ; R7b.1@702.018,209.318 ccw(c701.473,209.862) 702.243,209.862 ccw(c703.013,209.862) R7b.1@702.469,209.318 ; R7b.1@702.243,208.855 R7b.1@702.243,208.885 ; 702.243,211.007 R7b.1@702.243,209.042 704.85,209.042 ; R7b.1@702.469,208.816 cw(c703.013,208.272) 703.013,209.042 cw(c703.013,209.812) R7b.1@702.469,209.268 ; Cbs.1@665.596,229.935 cw(c663.177,227.516) U2.5@666.598,227.516 ; Cbs.1@665.596,229.935 cw(c663.177,227.516) U2.5@666.598,227.516 ; Cbs.1@665.596,229.935 cw(c663.177,227.516) U2.5@666.598,227.516 ; Cbs.1@665.596,229.935 cw(c663.177,227.516) U2.5@666.598,227.516 ; Cbs.1@666.134,230.474 cw(c665.016,229.355) 666.598,229.355 ; Cbs.1@666.134,230.474 cw(c665.016,229.355) 666.598,229.355 ; Cbs.1@666.134,230.474 cw(c665.016,229.355) 666.598,229.355 ; Cbs.1@666.134,230.474 cw(c665.016,229.355) 666.598,229.355 ; v2@667.582,217.354 ccw(c666.448,218.488) 668.052,218.488 ; v2@667.582,217.354 ccw(c666.448,218.488) 668.052,218.488 ; v2@667.582,217.354 ccw(c666.448,218.488) 668.052,218.488 ; v2@667.582,217.354 ccw(c666.448,218.488) 668.052,218.488 ; C5.2@667.826,219.18 cw(c667.282,218.636) 668.052,218.636 ; C5.2@667.826,219.18 cw(c667.282,218.636) 668.052,218.636 ; C5.2@667.826,219.18 cw(c667.282,218.636) 668.052,218.636 ; C5.2@667.826,219.18 cw(c667.282,218.636) 668.052,218.636 ; 668.052,218.333 ccw(c669.437,218.333) v2@668.458,217.354 ; 668.052,218.333 ccw(c669.437,218.333) v2@668.458,217.354 ; 668.052,218.333 ccw(c669.437,218.333) v2@668.458,217.354 ; 668.052,218.333 ccw(c669.437,218.333) v2@668.458,217.354 ; 668.052,218.636 cw(c668.822,218.636) C5.2@668.278,219.18 ; 668.052,218.636 cw(c668.822,218.636) C5.2@668.278,219.18 ; 668.052,218.636 cw(c668.822,218.636) C5.2@668.278,219.18 ; 668.052,218.636 cw(c668.822,218.636) C5.2@668.278,219.18 ; C9.2@693.024,217.035 ccw(c693.923,217.934) C9.2@693.923,216.662 ; C9.2@693.024,217.035 ccw(c693.923,217.934) C9.2@693.923,216.662 ; C9.2@693.024,217.035 ccw(c693.923,217.934) C9.2@693.923,216.662 ; C9.2@693.024,217.035 ccw(c693.923,217.934) C9.2@693.923,216.662 ; C9.2@693.563,217.573 ccw(c695.763,219.774) v2@695.763,216.662 ; C9.2@693.563,217.573 ccw(c695.763,219.774) v2@695.763,216.662 ; C9.2@693.563,217.573 ccw(c695.763,219.774) v2@695.763,216.662 ; C9.2@693.563,217.573 ccw(c695.763,219.774) v2@695.763,216.662 ; 694.466,216.662 cw(c694.466,215.168) v2@695.522,216.224 ; 694.466,216.662 ccw(c694.466,218.156) v2@695.522,217.1 ; 694.466,216.662 ccw(c694.466,218.156) v2@695.522,217.1 ; 694.466,216.662 cw(c694.466,215.168) v2@695.522,216.224 ; 694.466,216.662 ccw(c694.466,218.156) v2@695.522,217.1 ; 694.466,216.662 cw(c694.466,215.168) v2@695.522,216.224 ; 694.466,216.662 ccw(c694.466,218.156) v2@695.522,217.1 ; 694.466,216.662 cw(c694.466,215.168) v2@695.522,216.224 ; Cd.2@696.75,234.026 ccw(c695.59,235.186) 697.23,235.186 ; Cd.2@696.75,234.026 ccw(c695.59,235.186) 697.23,235.186 ; Cd.2@696.75,234.026 ccw(c695.59,235.186) 697.23,235.186 ; Cd.2@696.75,234.026 ccw(c695.59,235.186) 697.23,235.186 ; P8.4@696.863,235.937 cw(c695.977,235.051) 697.23,235.051 ; P8.4@696.863,235.937 cw(c695.977,235.051) 697.23,235.051 ; P8.4@696.863,235.937 cw(c695.977,235.051) 697.23,235.051 ; P8.4@696.863,235.937 cw(c695.977,235.051) 697.23,235.051 ; 697.23,235.051 cw(c698.483,235.051) P8.4@697.597,235.937 ; 697.23,235.051 cw(c698.483,235.051) P8.4@697.597,235.937 ; 697.23,235.051 cw(c698.483,235.051) P8.4@697.597,235.937 ; 697.23,235.051 cw(c698.483,235.051) P8.4@697.597,235.937
  Bottom Layer w1.27: R7b.1@702.056,209.042 702.15,208.948 702.243,208.855 R7.1@702.243,206.426 C10.1@702.243,204.013
  other v2: 668.02,216.916
pads on no net: S1.2 S1.MH1 S1.MH2 S2.MH1 S2.MH2 U3.3 U3.10
copper on no net: | length 12.5
  Bottom Layer w1.27: 782.104,206.718 786.054,202.768
  Bottom Layer w1.524: 782.104,209.308 786.994,204.419

## Polygon pours and split planes (outlines as drawn)
SOURCE on Bottom Layer "gnd" (solid, remove dead copper, pour order 6): 660.4,199.136 660.4,245.872 708.152,245.872 708.152,199.136
SOURCE on Top Layer "gnd" (solid, remove dead copper, pour order 8): 660.4,245.872 708.152,245.872 708.152,199.136 660.4,199.136

## Other copper
Top Layer:
  rectangle net GATE: 673.1,235.204 677.672,240.03
  rectangle net NetD1_2: 661.67,215.646 666.242,220.218
  rectangle net +24V: 703.072,212.598 707.644,217.424
Bottom Layer:
  rectangle net +24V: 811.022,160.782 815.594,217.678
  rectangle: 771.398,216.154 778.002,219.405
  rectangle: 769.62,216.154 774.192,220.726
  region net NetP7_1: 788.147,221.945 788.147,240.792 769.493,240.792 769.493,221.945
  region net NetDS_1: 767.588,219.405 767.588,160.782 788.056,160.782 788.056,219.405
  region net +24V: 791.047,192.964 791.047,160.782 814.984,160.782 814.984,192.964
  region net SOURCE: 791.047,240.792 791.047,207.975 809.193,207.975 809.193,240.792
  rectangle net +24V: 703.072,212.598 707.644,217.17
  rectangle net NetDS_1: 785.368,204.216 791.718,205.994
  rectangle net SOURCE: 796.29,196.088 809.193,208.407
  rectangle net NetCs_2: 789.178,196.088 795.02,203.454

## Silkscreen, mask and mechanical layers (free items; w line width, h text height)
Mechanical 1:
  region: 661.416,214.884 661.416,201.422 681.482,201.422 681.482,214.884
  lines w0.254: 660.248,198.882 660.248,245.948 ; 660.273,198.958 708.406,198.958 708.406,246.05 660.273,246.05 ; 766.674,159.766 766.674,245.948 ; 766.826,159.715 816.61,159.715 ; 766.826,246.05 816.61,246.05 ; 816.458,159.766 816.458,245.948

## Text inside footprints (layer, text, board x,y; h text height)
P4: Top Overlay "3" at 769.112,220.218 h1.27 r180; Top Overlay "4" at 769.112,217.678 h1.27 r180; Top Overlay "2" at 775.716,217.678 h1.27 r180; Top Overlay "1" at 775.208,220.218 h1.27 r180
P6: Bottom Overlay "3" at 677.164,234.78 h1.27 r90; Bottom Overlay "4" at 674.624,234.78 h1.27 r90; Bottom Overlay "2" at 674.624,241.384 h1.27 r90; Bottom Overlay "1" at 677.164,240.876 h1.27 r90
P7: Top Overlay "3" at 785.114,240.876 h1.27 r90; Top Overlay "4" at 782.574,240.876 h1.27 r90; Top Overlay "2" at 782.574,234.272 h1.27 r90; Top Overlay "1" at 785.114,234.78 h1.27 r90
P8: Bottom Overlay "3" at 700.278,234.78 h1.27 r90; Bottom Overlay "4" at 697.738,234.78 h1.27 r90; Bottom Overlay "2" at 697.738,241.384 h1.27 r90; Bottom Overlay "1" at 700.278,240.876 h1.27 r90
P9: Top Overlay "3" at 808.228,240.876 h1.27 r90; Top Overlay "4" at 805.688,240.876 h1.27 r90; Top Overlay "2" at 805.688,234.272 h1.27 r90; Top Overlay "1" at 808.228,234.78 h1.27 r90
P10: Bottom Overlay "3" at 707.136,212.09 h1.27 r90; Bottom Overlay "4" at 704.596,212.09 h1.27 r90; Bottom Overlay "2" at 704.596,218.694 h1.27 r90; Bottom Overlay "1" at 707.136,218.186 h1.27 r90
P11: Top Overlay "3" at 811.53,212.598 h1.27 r270; Top Overlay "4" at 814.07,212.598 h1.27 r270; Top Overlay "2" at 814.07,219.202 h1.27 r270; Top Overlay "1" at 811.53,218.694 h1.27 r270
S1: Top Overlay "S" at 774.697,188.164 h1.5; Top Overlay "D" at 803.197,188.364 h1.5; Top Overlay "G" at 803.197,170.564 h1.5; Top Overlay "S" at 774.897,170.864 h1.5
S2: Top Overlay "S" at 804.497,212.775 h1.5 r180; Top Overlay "D" at 775.997,212.575 h1.5 r180; Top Overlay "G" at 775.997,230.375 h1.5 r180; Top Overlay "S" at 804.297,230.075 h1.5 r180
U1: Top Overlay "1" at 698.068,204.902 h1.5 r180